# Altium PCB ESP32_Dongle.PcbDoc
Units mil, origin at the board's own origin, x right, y up, seen from the top; angles counter-clockwise.
Board outline 1330 x 1890 mil, 4 copper layers (L1, L2, L3, L4), stack 42.334 mil thick; 54 components, 44 nets, 205 pads, 118 vias.
Unrouted connection lines stored in the file: 123.
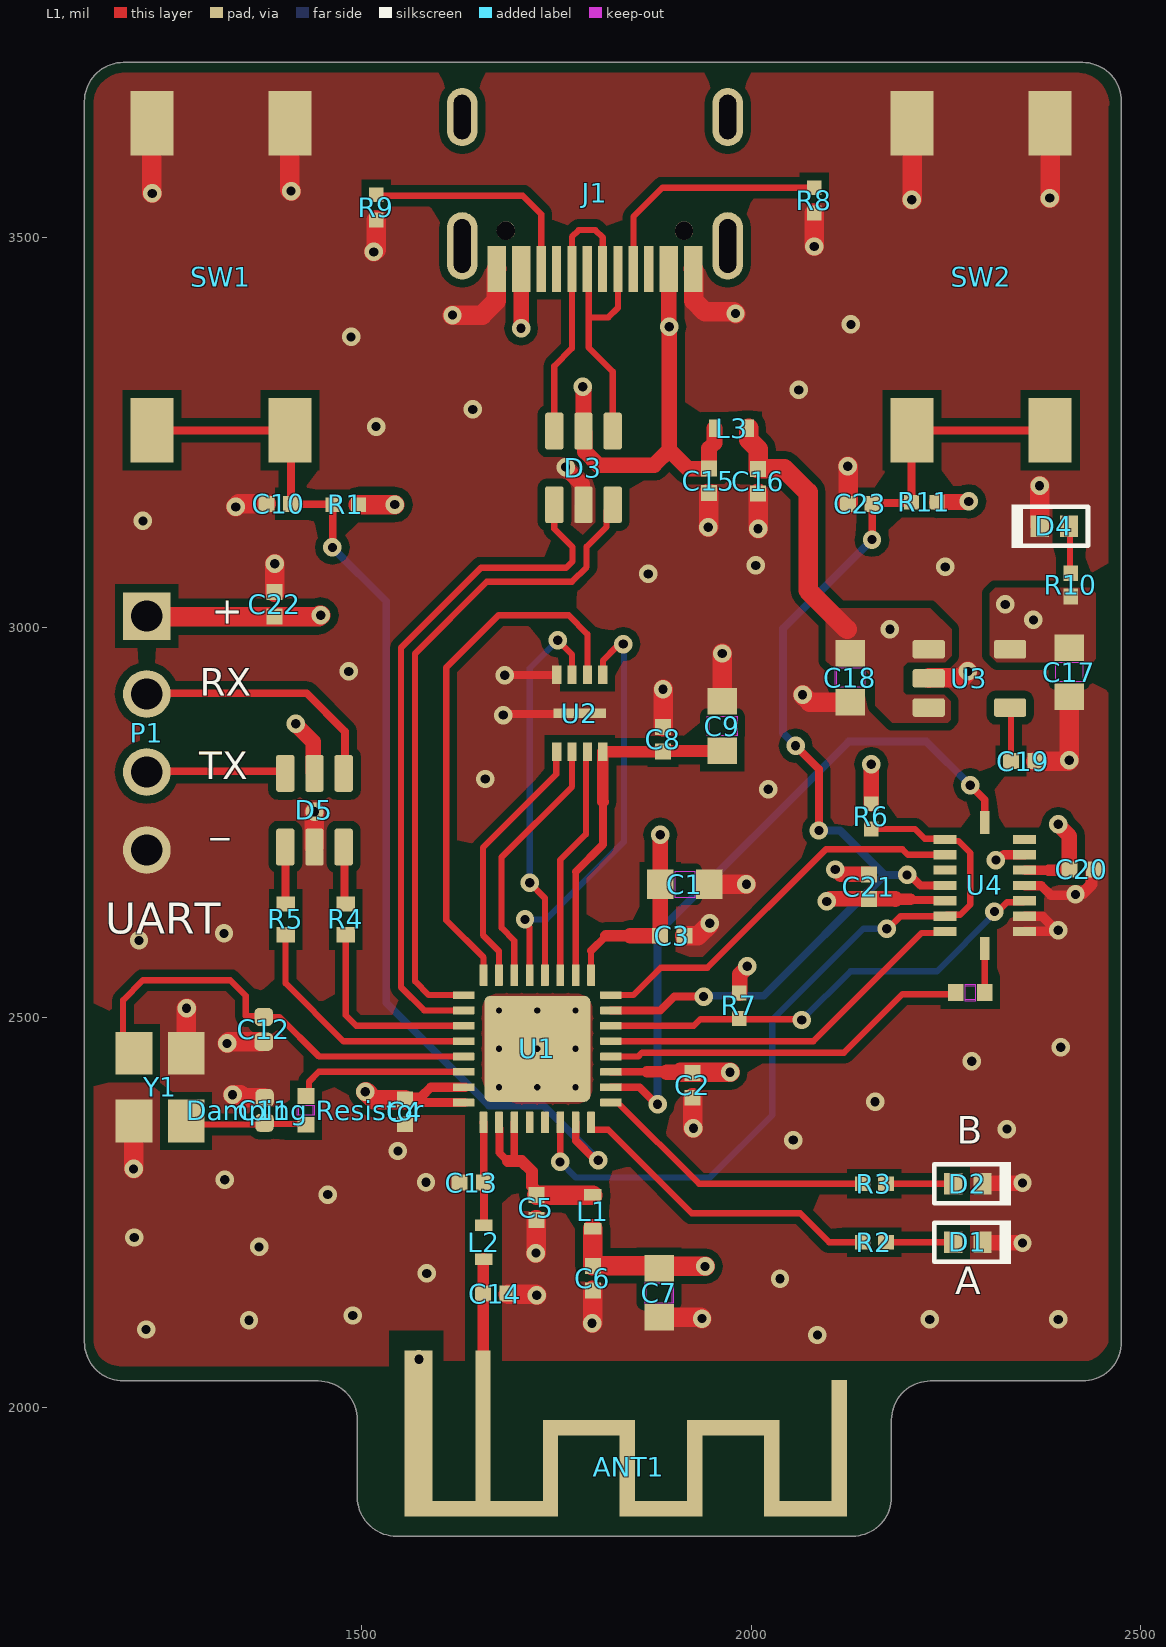
[diagram p0: L1 view]
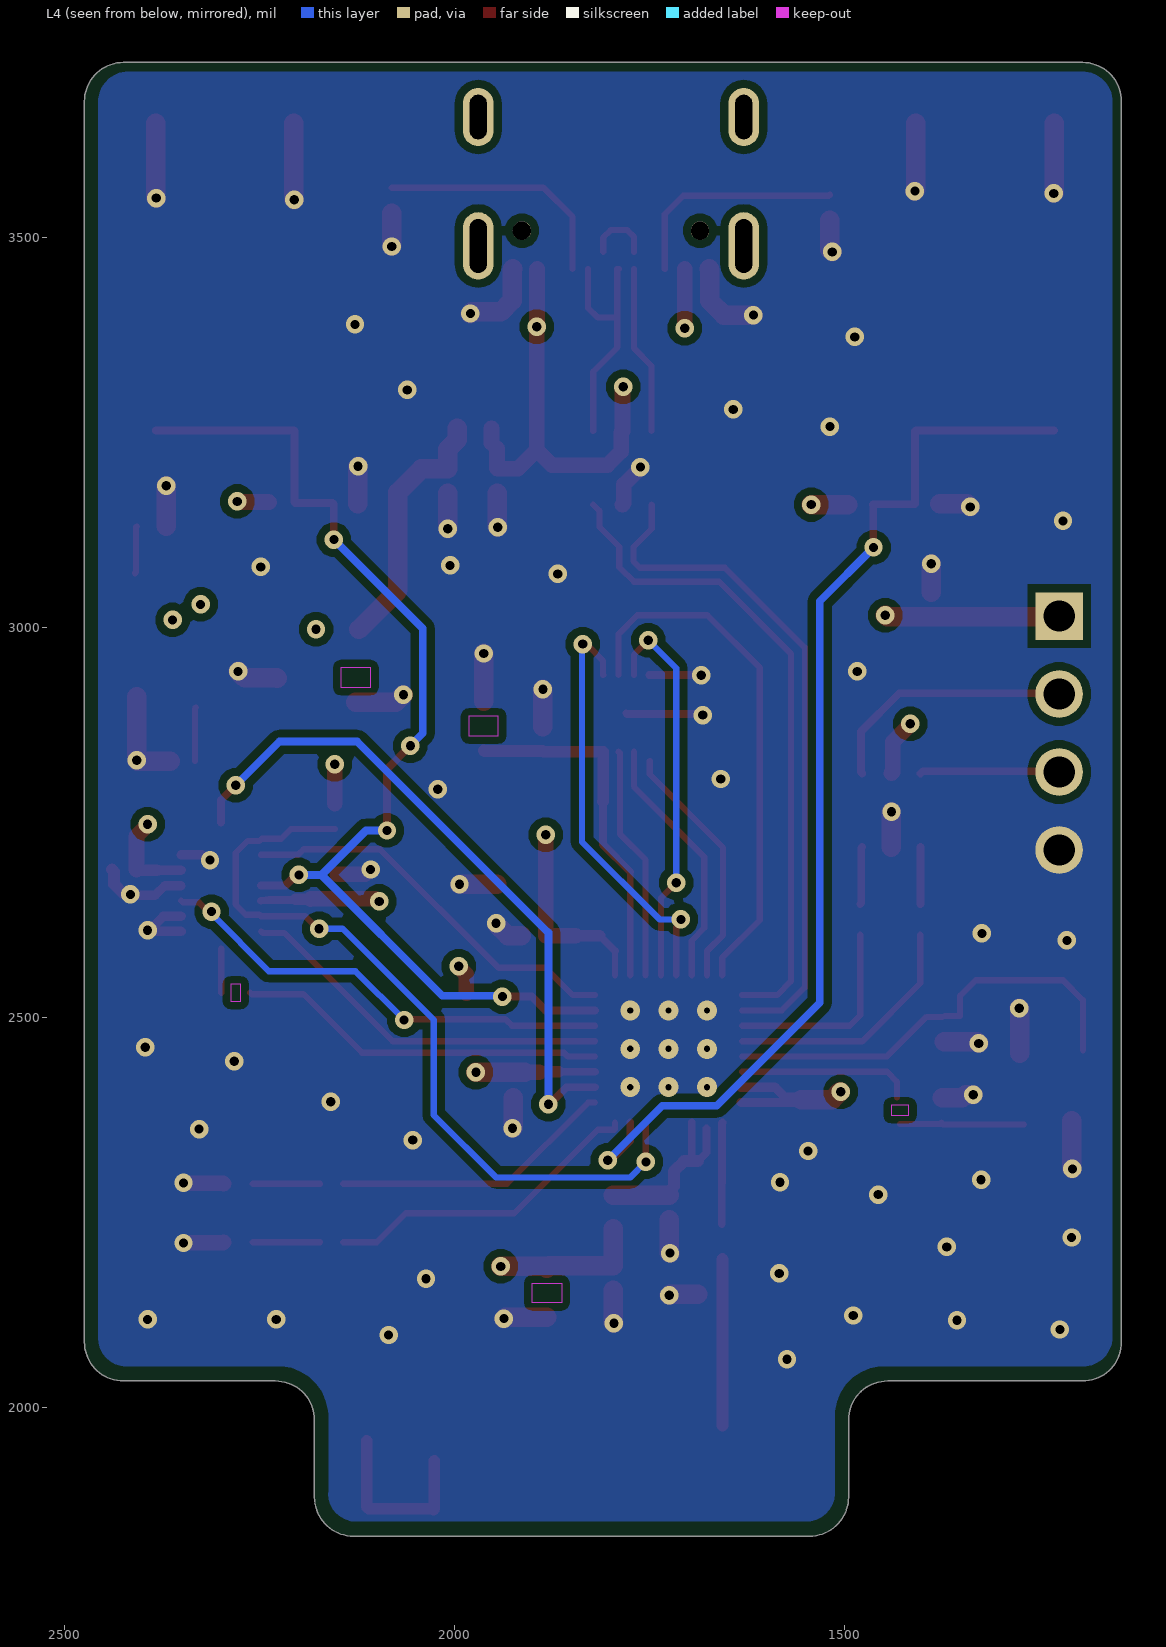
[diagram p1: L4 view, seen from below]
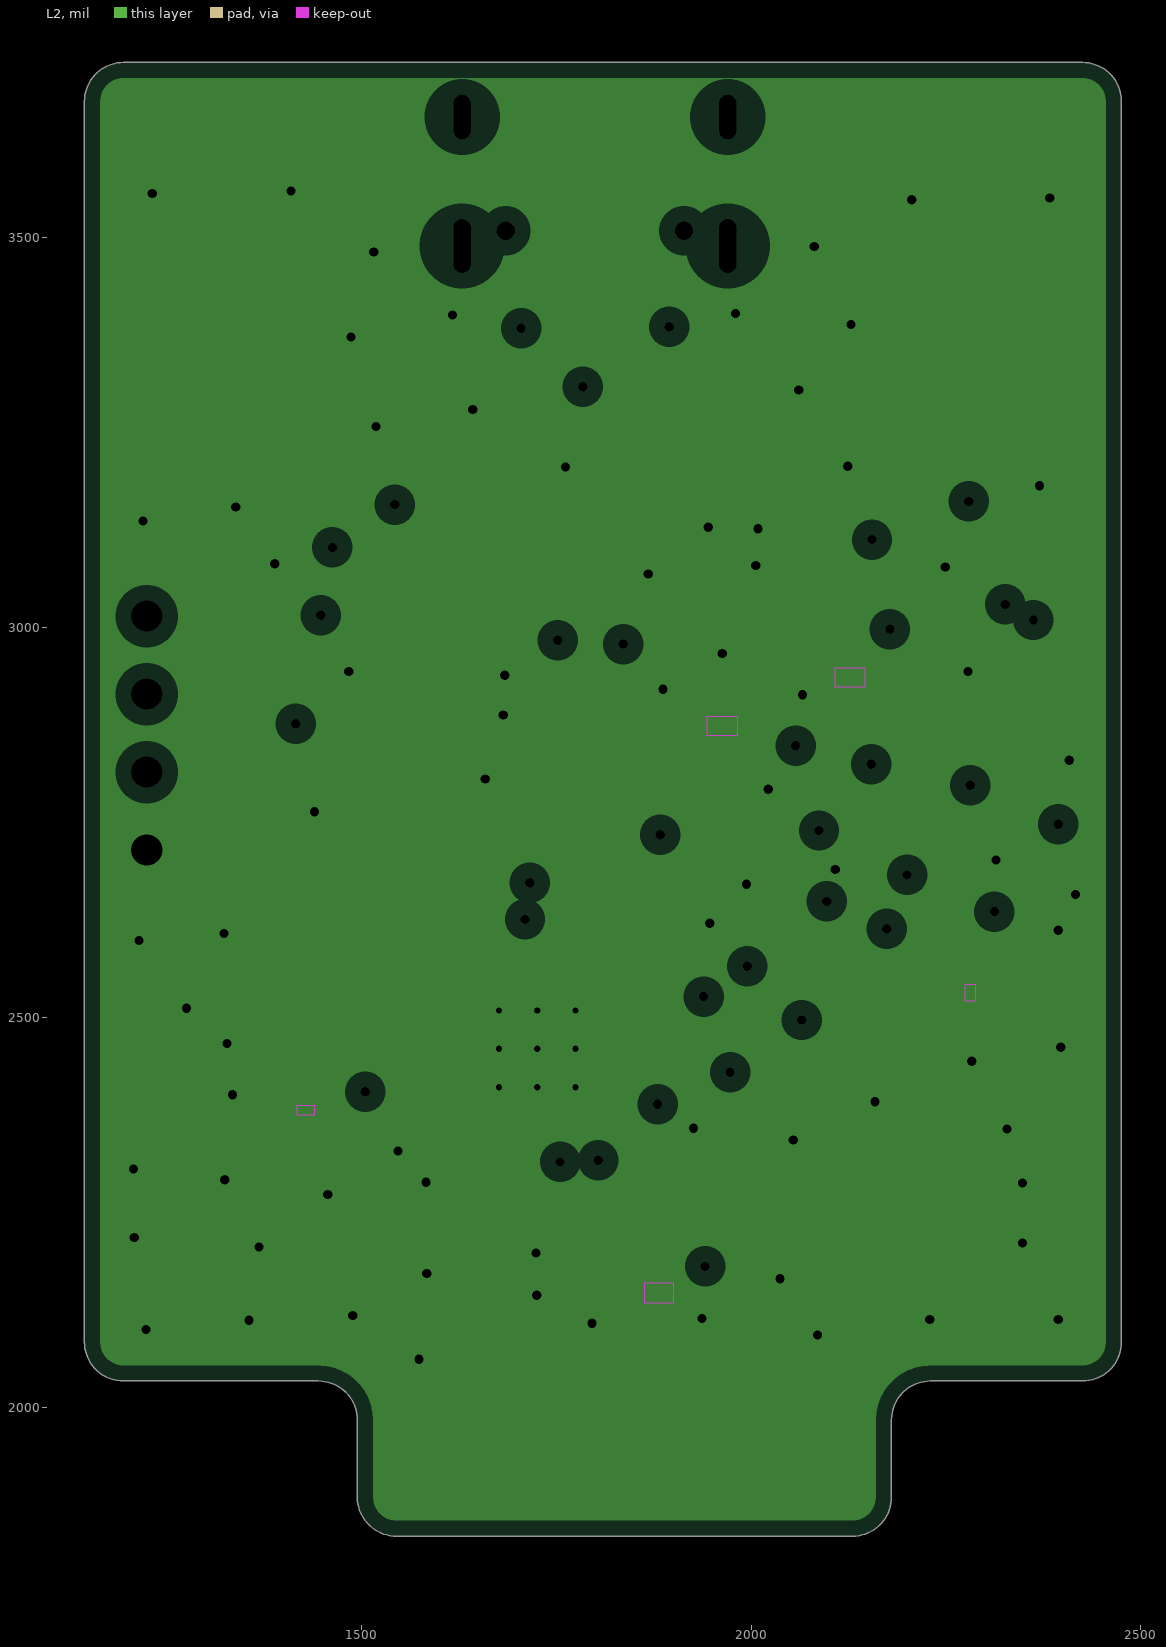
[diagram p2: L2, clearances drawn from the general rule]
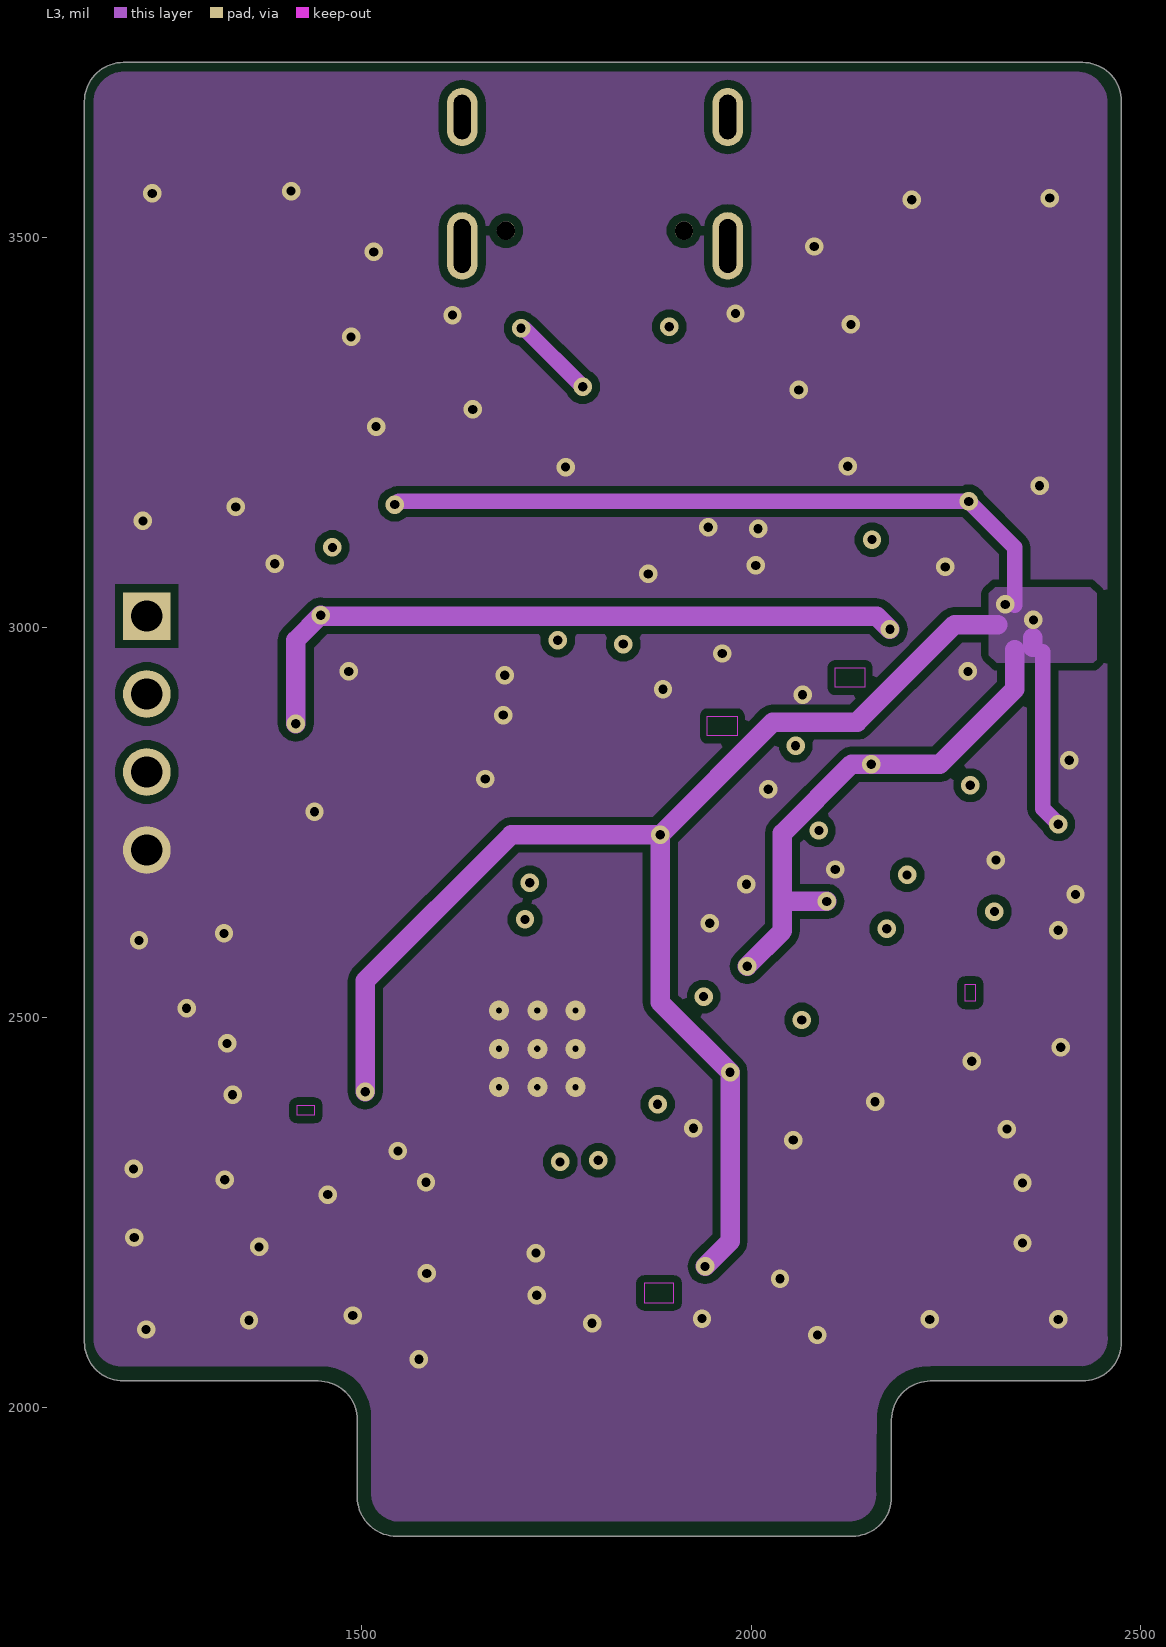
[diagram p3: L3]
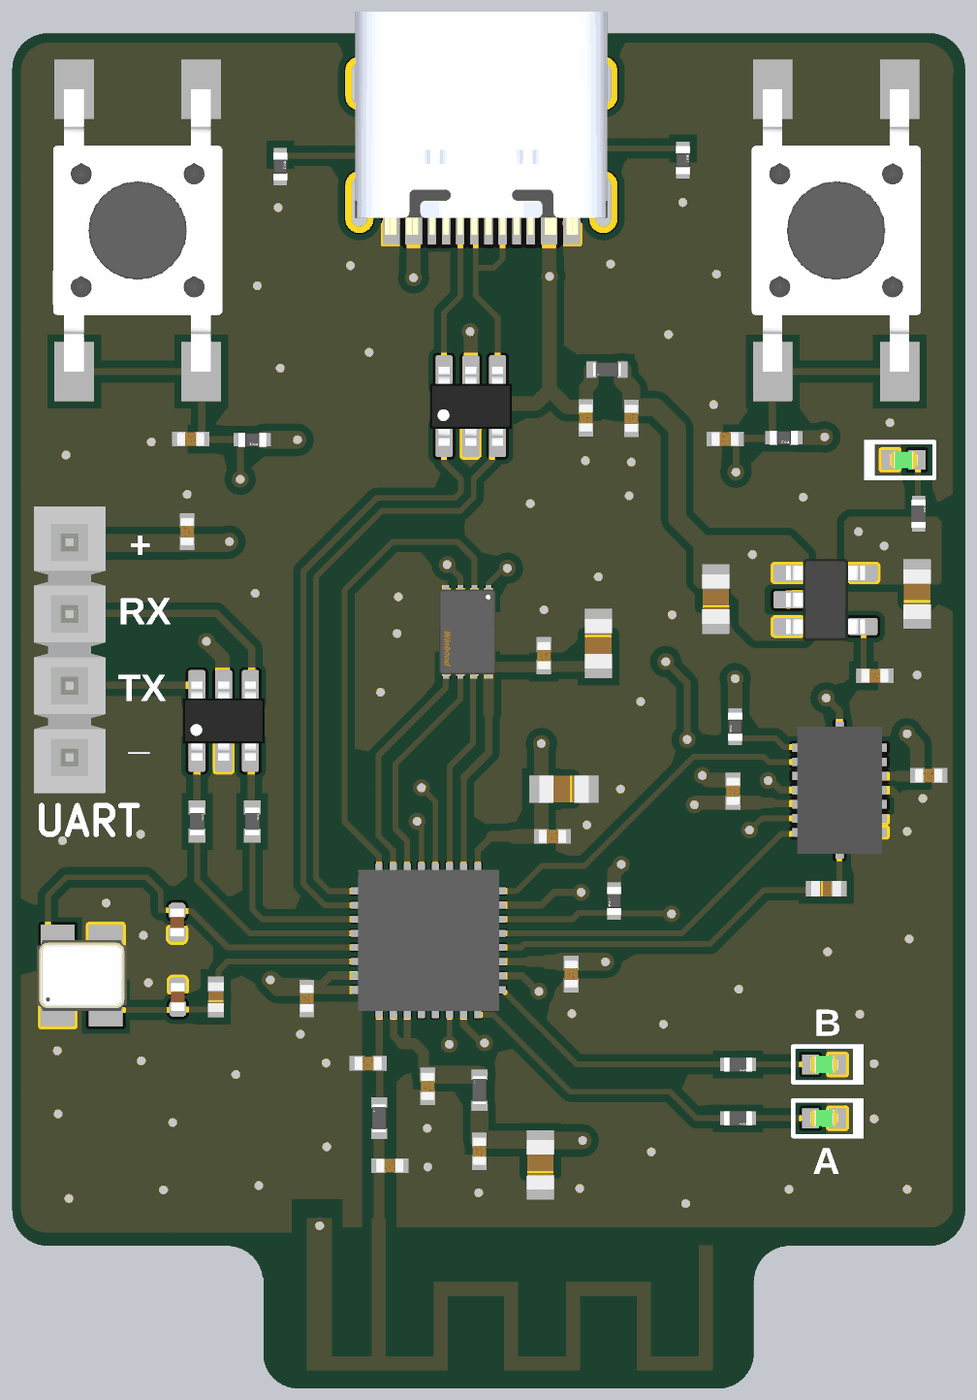
[diagram p4: 3D render of the assembled board from above, using the file's embedded part models]

## Layer stack, top to bottom
Top Solder: solder mask 0.4, Solder Resist, Dk 4
L1: signal copper 1.378
Dielectric 2: prepreg 5.1, PP-017, Dk 4.6
L2: plane copper 0.689, net GND
Dielectric 1: core 28, Core-039, Dk 4.6
L3: signal copper 0.689
Dielectric 3: prepreg 5.1, PP-017, Dk 4.6
L4: signal copper 1.378
Bottom Solder: solder mask 1, SM-001, Dk 4

## Board outline
1195,2034 cw(c1195,2084) 1145,2084 1145,3675 cw(c1195,3675) 1195,3725 2425,3725 cw(c2425,3675) 2475,3675 2475,2147 2475,2084 cw(c2425,2084) 2425,2034 2230,2034 ccw(c2230,1984) 2180,1984 2180,1885 cw(c2130,1885) 2130,1835 1545,1835 cw(c1545,1885) 1495,1885 1495,1984 ccw(c1445,1984) 1445,2034

## Design rules (kind name [scope] priority, off if disabled: settings)
Clearance Clearance_2 [InNamedPolygon('GND_L1') OR InNamedPolygon('GND_L3') OR InNamedPolygon('GND_L4')] p1: gap=10 ignorepadtopadclearanceinfootprint=TRUE
Clearance Clearance_1 [InComponent('U1') and InComponent('C9')] p2: gap=1 ignorepadtopadclearanceinfootprint=TRUE
Clearance [All] p3: gap=2 ignorepadtopadclearanceinfootprint=TRUE
DiffPairsRouting [All] p1: maxlimit=10 minlimit=10 mostfreqgap=10 toplayer_minwidth=8 toplayer_maxwidth=15 toplayer_prefwidth=10 midlayer1_minwidth=8 midlayer1_maxwidth=15 midlayer1_prefwidth=10 bottomlayer_minwidth=8 bottomlayer_maxwidth=15 bottomlayer_prefwidth=10 maxuncoupledlength=500
MinimumSolderMaskSliver [All] p1: minsoldermaskwidth=0
PlaneClearance [All] p1: clearance=20
PlaneConnect [All] p1: pad.planeconnectstyle=Relief pad.reliefexpansion=20 pad.reliefentries=4 pad.reliefconductorwidth=10 pad.reliefairgap=10 via.planeconnectstyle=Direct via.reliefexpansion=20 via.reliefentries=4 via.reliefconductorwidth=10 via.reliefairgap=10
PolygonConnect [All] p1: connectstyle=Direct reliefconductorwidth=10 reliefentries=4 polygonreliefangle="90 Angle" airgapwidth=10
RoutingVias [All] p1: holewidth=11.81 width=23.62 viastyle="Through Hole" minholewidth=11.81 minwidth=23.62 maxholewidth=28 maxwidth=50
ShortCircuit [All] p1: allowed=TRUE
SilkToSolderMaskClearance [IsPad] p1: minsilkscreentomaskgap=6 clearancetoexposedcopper=TRUE
SolderMaskExpansion [All] p1: expansion=4 istentingtop=FALSE
SupplyNets "Schematic Supply Nets_5" [InNet('3V3')] p1: voltage=0.000
SupplyNets "Schematic Supply Nets_4" [InNet('VCC_SPI')] p2: voltage=0.000
SupplyNets "Schematic Supply Nets_3" [InNet('VBUS_USB')] p3: voltage=0.000
SupplyNets "Schematic Supply Nets_2" [InNet('GND')] p4: voltage=0.000
SupplyNets "Schematic Supply Nets_1" [InNet('VBUS_FILT')] p5: voltage=0.000
SupplyNets "Schematic Supply Nets" [InNet('3V3_RF')] p6: voltage=0.000
Width [All] p1: maxlimit=25 minlimit=0.04 preferedwidth=8 minimp=50.000000 maximp=50.000000 favimp=50.000000
24 further rules are at their usual default settings.

## Classes and differential pairs
differential pair USB: +USB_P -USB_N
differential pair MCU_USB: +MCU_USB_P -MCU_USB_N

## Components (designator, comment, footprint, x,y, rotation, side; value= is the part's Value field where it differs from the comment)
ANT1 "PCB Antenna 2.4GHz 50Ohm" ANT_IFA_USB_2_4GHZ_50R 1573.5,2072.82 r0 top
C1 "10u 10V" CAP_0603J_AVX#1 1915,2671 r180 top
C2 "100nF 25V" FP-C0402-BB-MFG 1925,2413 r270 top value="0.10 μF"
C3 "100nF 25V" FP-C0402-BB-MFG 1899,2605 r0 top value="0.10 μF"
C4 "100nF 25V" FP-C0402-BB-MFG 1556,2379 r270 top value="0.10 μF"
C5 "100nF 25V" FP-C0402-BB-MFG 1724.68,2256.49 r270 top value="0.10 μF"
C6 "100nF 25V" FP-C0402-BB-MFG 1797,2166 r270 top value="0.10 μF"
C7 "10u 10V" CAP_0603J_AVX#2 1882,2147 r90 top
C8 "100nF 25V" FP-C0402-BB-MFG 1887,2857 r90 top value="0.10 μF"
C9 "10u 10V" CAP_0603J_AVX#2 1963,2874 r270 top
C10 "100nF 25V" FP-C0402-BB-MFG 1394,3159 r180 top value="0.10 μF"
C11 "10p" CAPC1005X55N 1376,2381 r270 top
C12 "10p" CAPC1005X55N 1375,2485 r90 top
C13 "3.3p" FP-C0402-BB-MFG 1641.68,2288.49 r0 top value="33,000 pF"
C14 "3.3p" FP-C0402-BB-MFG 1672,2146 r180 top value="33,000 pF"
C15 "100nF 25V" FP-C0402-BB-MFG 1945.68,3188.49 r270 top value="0.10 μF"
C16 "100nF 25V" FP-C0402-BB-MFG 2009,3188 r270 top value="0.10 μF"
C17 "10u 10V" CAP_0603J_AVX#1 2408,2943 r90 top
C18 "10u 10V" CAP_0603J_AVX#2 2127,2936 r90 top
C19 "100nF 25V" FP-C0402-BB-MFG 2349,2829 r0 top value="0.10 μF"
C20 "100nF 25V" FP-C0402-BB-MFG 2424,2690 r0 top value="0.10 μF"
C21 "100nF 25V" FP-C0402-BB-MFG 2151,2668 r270 top value="0.10 μF"
C22 "100nF 25V" FP-C0402-BB-MFG 1389,3030 r90 top value="0.10 μF"
C23 "100nF 25V" FP-C0402-BB-MFG 2140,3159 r180 top value="0.10 μF"
D1 "GREEN" LED0402G 2278,2212 r180 top
D2 "GREEN" LED0402G 2278,2287 r180 top
D3 "USBLC6-2SC6" SOT-23-6 1785,3205 r0 top
D4 "GREEN" LED0402G 2389,3130 r0 top
D5 "USBLC6-2SC6" SOT-23-6 1440,2766 r0 top
"Damping Resistor" "22R" 0402_PAN 1429,2381 r90 top
J1 "TYPE-C-31-M-12" TYPE-C-31-M-12 1799.72,3572.32 r180 top
L1 "2.2nF 0.35A" FP-MLZ1005-IPC_B 1797,2251 r90 top
L2 "2.2nF 0.35A" FP-MLZ1005-IPC_B 1657,2212 r90 top
L3 "2.2nF 0.35A" FP-MLZ1005-IPC_B 1975,3256 r180 top
P1 "TSW-104-08-L-S" SMTC-TSW-104-08-X-S 1225,3015 r270 top
R1 "5.1k" FP-RN73R1E-IPC_C 1480,3158 r0 top
R2 "1k 50V" FP-AC0402-IPC_C 2158,2212 r0 top
R3 "1k 50V" FP-AC0402-IPC_C 2158,2287 r0 top
R4 "470R" FP-AC0402-MFG 1480,2626 r90 top
R5 "470R" FP-AC0402-MFG 1403,2626 r90 top
R6 "5.1k" FP-RN73R1E-IPC_C 2154,2758 r270 top
R7 "5.1k" FP-RN73R1E-IPC_C 1985,2515 r270 top
R8 "5.1k" FP-RN73R1E-IPC_C 2081,3548 r90 top
R9 "5.1k" FP-RN73R1E-IPC_C 1519,3539 r90 top
R10 "1k 50V" FP-AC0402-IPC_C 2410,3055 r90 top
R11 "5.1k" FP-RN73R1E-IPC_C 2222,3161 r0 top
SW1 "1301.9315.24" FP-1301_9315_24-MFG 1320,3450 r270 top
SW2 "1301.9315.24" FP-1301_9315_24-MFG 2295,3450 r270 top
U1 "ESP32-C3" QFN32-5x5 1725.79,2460 r90 top
U2 "W25Q16JVUXIQ" FP-UX-MFG 1780.21,2890.28 r270 top
U3 "SPX3819M5-L-3-3/TR" SOT-23-5 2280,2935 r0 top
U4 "BMI055" BMI088 2299.68,2669.49 r270 top
Y1 "C3E-40.000-10-1015-X-R" XTAL_C3E-40.000-10-1015-X-R 1242,2411 r270 top
? "22R" 0402_PAN 2281,2532 r0 top

## Footprints (in the part's own frame and the unit in brackets; to place one, negate y for a bottom-side part, rotate by r counter-clockwise, add the part's x,y. Pads: shape width x height; smd on the part's side, far side on the other; paste and mask are expansions set on the pad)
0402_PAN [mil]
  rect 20x22 smd paste+0 mask+0: 1(-18.5,0) 2(18.5,0)
  L1 keep-out region: -6.5,-9 -6.5,9 6.5,9 6.5,-9
  Keep-Out Layer region: -6.5,-11 -6.5,11 6.5,11 6.5,-11
  body extent -21,-11 21,11, height 16
ANT_IFA_USB_2_4GHZ_50R [mm]
  rect 5x0.5 smd paste-2539.97 mask+0.102: 1(2.05,-5.15)
  rect 0.5x4.9 smd paste-2539.97 mask+0.102: 1(2.1,-2.45)
  rect 0.5x2.64 smd paste-2539.97 mask+0.102: 1(4.3,-3.58) 1(6.8,-3.58) 1(9,-3.58) 1(11.5,-3.58)
  rect 2x0.5 smd paste-2539.97 mask+0.102: 1(5.55,-2.51) 1(10.25,-2.51)
  rect 2.7x0.5 smd paste-2539.97 mask+0.102: 1(7.9,-5.15) 1(12.6,-5.15)
  rect 0.5x3.94 smd paste-2539.97 mask+0.102: 1(13.7,-2.93)
  rect 0.9x4.9 smd paste-2539.97 mask+0.102: 2(0,-2.45)
BMI088 [mm]
  rect 0.3x0.75 smd: 1(-1.5,1.3) 2(-1,1.3) 3(-0.5,1.3) 4(0,1.3) 5(0.5,1.3) 6(1,1.3) 7(1.5,1.3) 9(1.5,-1.3) 10(1,-1.3) 11(0.5,-1.3) 12(0,-1.3) 13(-0.5,-1.3) 14(-1,-1.3) 15(-1.5,-1.3)
  rect 0.75x0.3 smd: 8(2.05,0) 16(-2.05,0)
  body extent -2.25,-1.5 2.25,1.5, height 1.01
CAP_0603J_AVX#1 [mil]
  rect 34x38 smd paste+0 mask+0: 1(-31.5,0) 2(31.5,0)
  L1 keep-out region: -12.5,-17 -12.5,17 12.5,17 12.5,-17
  body extent -34,-19 34,19, height 37
CAP_0603J_AVX#2 [mil]
  rect 34x38 smd paste+0 mask+0: 1(-31.5,0) 2(31.5,0)
  L1 keep-out region: -12.5,17 -12.5,-17 12.5,-17 12.5,17
  Keep-Out Layer region: -12.5,19 -12.5,-19 12.5,-19 12.5,19
  body extent -34,-19 34,19, height 37
CAPC1005X55N [mm]
  rrect53% 0.59x0.6 smd: 1(-0.405,0) 2(0.405,0)
  body extent -0.5,-0.25 0.5,0.25, height 0.55
FP-1301_9315_24-MFG [mm]
  rect 2.1x1.4 smd paste+0 mask+0: 1(-5,2.25) 2(5,2.25) 3(-5,-2.25) 4(5,-2.25)
  body extent -6.15,-3.1 6.15,3.1, height 0.25
FP-AC0402-IPC_C [mil]
  rect 20.29x18.6 smd paste+0 mask+0: 1(-14.9,0) 2(14.9,0)
  body extent -29,-15 29,15, height 10
FP-AC0402-MFG [mm]
  rect 0.5x0.6 smd paste+0 mask+0: 1(-0.5,0) 2(0.5,0)
  body extent -0.85,-0.4 0.85,0.4, height 0.25
FP-C0402-BB-MFG [mm]
  rect 0.52x0.52 smd paste+0 mask+0: 1(-0.4,0) 2(0.4,0)
  body extent -0.8,-0.4 0.8,0.4, height 0.25
FP-MLZ1005-IPC_B [mm]
  rect 0.372x0.572 smd paste+0 mask+0: 1(-0.55,0) 2(0.55,0)
  body extent -0.5,-0.25 0.5,0.25, height 0.55
FP-RN73R1E-IPC_C [mil]
  rect 19.2x18.6 smd paste+0 mask+0: 1(-16.3,0) 2(16.3,0)
  body extent -30,-15 30,15, height 10
FP-UX-MFG [mm]
  rect 0.6x0.3 smd paste-1000 mask-1000: 1(-1.25,0.75) 2(-1.25,0.25) 3(-1.25,-0.25) 4(-1.25,-0.75) 5(1.25,-0.75) 6(1.25,-0.25) 7(1.25,0.25) 8(1.25,0.75)
  rect 0.3x1.7 smd paste-1000 mask+0: 9(0,0)
  body extent -1.75,-1.15 1.75,1.15, height 0.25
LED0402G [mm]
  rect 0.6x0.7 smd: 1(-0.475,0) 2(0.475,0)
  silkscreen extent -1.4,-0.71 1.09,0.71, body extent -0.5,-0.3 0.5,0.3, height 0.21
QFN32-5x5 [mm]
  rrect10% 0.7x0.25 smd mask+0.05: 1(-2.4,1.75) 2(-2.4,1.25) 3(-2.4,0.75) 4(-2.4,0.25) 5(-2.4,-0.25) 6(-2.4,-0.75) 7(-2.4,-1.25) 8(-2.4,-1.75) 17(2.4,-1.75) 18(2.4,-1.25) 19(2.4,-0.75) 20(2.4,-0.25) 21(2.4,0.25) 22(2.4,0.75) 23(2.4,1.25) 24(2.4,1.75)
  rrect10% 0.25x0.7 smd mask+0.05: 9(-1.75,-2.4) 10(-1.25,-2.4) 11(-0.75,-2.4) 12(-0.25,-2.4) 13(0.25,-2.4) 14(0.75,-2.4) 15(1.25,-2.4) 16(1.75,-2.4) 25(1.75,2.4) 26(1.25,2.4) 27(0.75,2.4) 28(0.25,2.4) 29(-0.25,2.4) 30(-0.75,2.4) 31(-1.25,2.4) 32(-1.75,2.4)
  rrect10% 3.45x3.45 smd mask+0.07: 33(0,0)
  body extent -2.5,-2.5 2.5,2.5, height 0.85
SMTC-TSW-104-08-X-S [mm] ".025 SQ Post Terminal Strip Assembly, 1x4 Pins, Vertical, 2.54mm Pitch, Male"
  rect 1.55x1.55 hole 1.02: 1(0,0)
  round 1.55 hole 1.02: 2(2.54,0) 3(5.08,0) 4(7.62,0)
  body extent -1.27,-1.27 8.89,1.27, height 8.38
SOT-23-5 [mm] "SOT23, 5-Leads, Body 2,90x2,80mm, Pitch 0,95mm, IPC Medium Density"
  rrect25% 1.05x0.6 smd: 1(-1.325,0.95) 2(-1.325,0) 3(-1.325,-0.95) 4(1.325,-0.95) 5(1.325,0.95)
  body extent -1.4,-1.45 1.4,1.45, height 1.45
SOT-23-6 [mm]
  rrect25% 0.6x1.2 smd: 1(-0.95,-1.2) 2(0,-1.2) 3(0.95,-1.2) 4(0.95,1.2) 5(0,1.2) 6(-0.95,1.2)
  body extent -1.45,-1.4 1.45,1.4, height 1.45
TYPE-C-31-M-12 [mm]
  rect 0.6x1.5 smd mask+0.07: A1B12(-3.2,2.85) B1A12(3.2,2.85)
  rect 0.6x1.5 smd mask+0.14: A4B9(-2.4,2.85) B4A9(2.4,2.85)
  rect 0.3x1.5 smd mask+0.14: A5(-1.25,2.85) A6(-0.25,2.85) A7(0.25,2.85) A8(1.25,2.85) B5(1.75,2.85) B6(0.75,2.85) B7(-0.75,2.85) B8(-1.75,2.85)
  round 0.6 hole 0.6 unplated mask+0.3: MH(-2.9,1.6) MH(2.9,1.6)
  oval 1x1.9 hole 0.55 slot 1.45 at 90 deg mask+0.05: SH(-4.325,-2.1) SH(4.325,-2.1)
  oval 1x2.2 hole 0.55 slot 1.75 at 90 deg mask+0.05: SH(-4.325,2.1) SH(4.325,2.1)
  body extent -4.47,-4.65 4.47,3.25, height 3.32
XTAL_C3E-40.000-10-1015-X-R [mm]
  rect 1.4x1.2 smd: 1(-1.1,-0.85) 2(1.1,-0.85) 3(1.1,0.85) 4(-1.1,0.85)
  body extent -1.6,-1.25 1.6,1.25, height 0.75

## Part data
ANT1: library part ANT_IFA_USB_2_4GHZ_50R, "Inverted F 2.4GHz ISM PCB Antenna 50 Ohm", ComponentLink1Description=Datasheet, ComponentLink1URL=https://www.ti.com/lit/an/swra117d/swra117d.pdf
C1 C7 C9 C17 C18: library part 0603ZD106KAT4A, "No Description Available", Manufacturer_Name="KYOCERA AVX", Copyright="Copyright (C) 2026 Ultra Librarian. All rights reserved.", Manufacturer_Part_Number=0603ZD106KAT4A
C2 C3 C4 C5 C6 C8 C10 C15 C16 C19 C20 C21 C22 C23: library part CMP-03020-014070-2, "CAP CER 0.1UF 25V X5R 0402", Capacitance="0.10 μF", Manufacturer=Kemet, Manufacturer Part Number=C0402C104M3PAC7867, Package=C0402-BB, Temperature="-55°C to +125°C", Temperature Characteristic=X5R, Temperature Coefficient=15%, Temperature Range High=+125°C, Temperature Range Low=-55°C, Tolerance=0.2, Voltage Rating="25 V", Automotive=No, Category=Cap, ComponentLink2Description=Datasheet, ComponentLink2URL=https://content.kemet.com/datasheets/KEM_C1002_X7R_SMD.pdf, Device Class L1="Passive Components", Device Class L2=Capacitors, Device Class L3="Ceramic Capacitors", Digikey Description="CAP CER 0.1UF 25V X5R 0402", Height=0.55mm, Lead Free=Yes, Material=Ceramic, Octopart=https://octopart.com/c0402c104m3pac7867-kemet-84304880, RoHS=TRUE, Ipc Land Pattern Name=CAPC10050X50
C11 C12: library part C0402C100K5GACTU, "10 pF Â±10% 50V Ceramic Capacitor C0G, NP0 0402 (1005 Metric)", Package="0402 KEMET", Check_prices=https://www.snapeda.com/parts/C0402C100K5GACTU/KEMET/view-part/?ref=eda, MF=KEMET, MP=C0402C100K5GACTU, SnapEDA_Link=https://www.snapeda.com/parts/C0402C100K5GACTU/KEMET/view-part/?ref=snap
C13 C14: library part CMP-03020-024301-1, "CAP CER 0.033UF 25V X7R 0402", Capacitance="33,000 pF", Manufacturer=Kemet, Manufacturer Part Number=C0402C333K3RACAUTO, Package=C0402-BB, Temperature="-55°C to +125°C", Temperature Characteristic=X7R, Temperature Coefficient=15%, Temperature Range High=+125°C, Temperature Range Low=-55°C, Tolerance=0.1, Voltage Rating="25 V", Automotive=No, Category=Cap, ComponentLink2Description=Datasheet, ComponentLink2URL=https://content.kemet.com/datasheets/KEM_C1002_X7R_SMD.pdf, Device Class L1="Passive Components", Device Class L2=Capacitors, Device Class L3="Ceramic Capacitors", Digikey Description="CAP CER 0.033UF 25V X7R 0402", Height=0.55mm, Lead Free=Yes, Material=Ceramic, Octopart=https://octopart.com/c0402c333k3racauto-kemet-47202579, RoHS=TRUE, Ipc Land Pattern Name=CAPC10050X50
D1 D2 D4: library part VLMG1500-GS08, "LED YLW-GRN 0402 SMD", Case Code (Metric)=1005, Case Code (Imperial)=0402, Color=Green,Yellow, Forward Current=30mA, Forward Voltage=2V, LCSC Part Number=C511404, Lens Color=Clear, Manufacturer=Vishay, Max Operating Temperature=85°C, Min Operating Temperature=-30°C, Package Quantity=1, Power Dissipation=75mW, Reverse Voltage=5V, Supplier Part Number=VLMG1500-GS08CT-ND, Test Current=20mA, Illumination Color=Green, Case/Package=0402, Category=LEDs, ComponentLink1Description=https://datasheet.ciiva.com/12071/vlmo1500-244705-12071911.pdf?src-supplier=Mouser, ComponentLink1URL=https://datasheet.ciiva.com/12071/vlmo1500-244705-12071911.pdf?src-supplier=Mouser, ComponentLink2Description=https://datasheet.ciiva.com/30005/vlmo1500-30005134.pdf?src-supplier=Avnet, ComponentLink2URL=https://datasheet.ciiva.com/30005/vlmo1500-30005134.pdf?src-supplier=Avnet, Depth=0.5mm, Dominant Wavelength=571nm, Height=0.35mm, Lead Free="Lead Free", Length=1mm, Lens Style=Rectangular, Luminous Intensity=35mcd, Manufacturer Part Number=VLMG1500-GS08, Mounting Technology="Surface Mount", Number of Elements=1, Number of LEDs=1, Packaging="Tape and Reel", Pins=2, Power Rating=75mW, Pricing="1=0.34, 10=0.265, 100=0.119, 500=0.10746, 1000=0.08827 (USD)", Radiation Hardening=No, Reach SVHC Compliant=Unknown, RoHS=Yes, RoHS Compliant=Yes, Series=CHipLED, Stock=98, Supplier=Digikey, Viewing Angle=130°, Wavelength=571nm, Width=0.5mm
D3 D5: "Low-Capacitance ESD Protection USB", Manufacturer=STMicroelectronics, Distributor Link=https://www.mouser.de/ProductDetail/STMicroelectronics/USBLC6-2SC6?qs=po45yt2pPpu%2FhNIlwQdTlg%3D%3D, Manufacturer Part Number=USBLC6-2SC6
"Damping Resistor" ?: library part ERJ2RKD22R0X, "No Description Available", Manufacturer_Name=Panasonic, Copyright="Copyright (C) 2026 Ultra Librarian. All rights reserved.", Manufacturer_Part_Number=ERJ2RKD22R0X
J1: "USB Type C Connector Horizontal SMT", Manufacturer="Koren Hroparts", Manufacturer Part Number=TYPE-C-31-M-12
L1 L2 L3: library part CMP-08253-000201-1, "Shielded Multilayer Inductor 2.2uH ±20% 350mA 715mΩ SMD 0402", Case Code (Metric)=1005, Case Code (Imperial)=0402, Current Rating=350mA, DC Resistance (DCR)=715mR, Max Operating Temperature=125°C, Min Operating Temperature=-55°C, Package Quantity=10000, Saturation Current=60mA, Self Resonant Frequency=120MHz, Test Frequency=2MHz, Tolerance=20%, Inductance=2.2uH, Case/Package=0402, Core Material=Ferrite, Height - Seated (Max)=0.022inch, Length=0.039inch, Mount="Surface Mount", Packaging="Tape and Reel", RoHS Compliant=Yes, Shielding=Shielded, Width=0.02inch
P1: library part CMP-1024-00358-1, "0.025\" SQ Post Header, Through-hole, Vertical, -55 to 125 degC, 2.54 mm Pitch, 4-Pin, Male, RoHS", Manufacturer=Samtec, Temperature Range="-55 to 125 degC", ComponentLink1Description="Manufacturer URL", ComponentLink1URL=http://www.samtec.com, ComponentLink2Description=Datasheet, ComponentLink2URL=http://www.samtec.com/documents/webfiles/pdf/TSW_TH.PDF, ComponentLink3Description="Package Specification", ComponentLink3URL=http://www.samtec.com/documents/webfiles/cpdf/TSW-XXX-XX-XXX-X-XX-XXX-MKT.pdf, DatasheetVersion=F-214, Mounting Technology=Through-hole, Orientation=Vertical, PackageDescription=".025[0.64] SQ. Post Terminal Strip Assembly", PackageReference=TSW-104-08-X-S, PackageVersion="DM, 8/1988", PartNumber=TSW-104-08-L-S, Pitch="2.54 mm", RoHS=True
R1 R6 R7 R8 R9 R11: library part CMP-04015-008529-1, "5.1kΩ ±1% 0.063W, 1/16W Chip Resistor 0402 (1005 Metric) Moisture Resistant Thin Film"
R2 R3 R10: library part CMP-03412-047873-1, "RES 1kΩ ±1% 0.063W 0402", RoHS Compliant=Yes
R4 R5: library part CMP-03412-049712-1, "RES 470Ω ±5% 0.063W 0402"
SW1 SW2: library part CMP-26321-000002-1, "SWITCH TACTILE SPST-NO 0.05A 12V", Case/Package=SMD/SMT, Current Rating=50mA, Max Operating Temperature=70°C, Max Voltage Rating (DC)=12V, Min Operating Temperature=-20°C, Operating Force=1.6N, Package Quantity=1000, Ratings=IP40, Actuator Type=Standard, Contact Plating=Silver, Depth=10mm, Length=6mm, Max Current Rating=50mA, Mechanical Life=100000Cycles, Mount="Surface Mount", Orientation=Straight, Packaging="Tape and Reel", Radiation Hardening=No, REACH SVHC="No SVHC", RoHS Compliant=Yes, Series=LSH, Switch Function=Off-Mom, Switch Travel=0.25mm, Termination="Gull Wing", Throw Configuration=SPST, Voltage Rating (AC)=12V, Voltage Rating (DC)=12V, Illumination Type=Illuminated
U1: "Ultra­Low­Power SoC with RISC­V Single­Core CPU Supporting IEEE 802.11b/g/n (2.4 GHz Wi­Fi) and Bluetooth® 5 (LE)", LCSC=C2838500, Manufacturer=Espressif, Manufacturer Part Number=ESP32-C3
U2: library part CMP-78876-000011-1, "IC FLASH 16MBIT SPI/QUAD 8USON", RoHS Compliant=Yes
U3: "500mA +3.3V Low-Noise LDO Voltage Regulator", Manufacturer=MaxLinear, Manufacturer Part Number=SPX3819M5-L-3-3/TR
U4: "Inertial Measurement Unit IMU 6-Axis LGA", LCSC=C189620, Manufacturer=Bosch, Manufacturer Part Number=BMI055
Y1: "40 MHz Â±10ppm Crystal 10pF 50 Ohms 4-SMD, No Lead", Package="SMD-4 Aker", Check_prices=https://www.snapeda.com/parts/C3E-40.000-10-1015-X-R/Aker/view-part/?ref=eda, MF="Aker Technology USA", MP=C3E-40.000-10-1015-X-R, SnapEDA_Link=https://www.snapeda.com/parts/C3E-40.000-10-1015-X-R/Aker/view-part/?ref=snap

## Via types
v1: diameter 23.62, hole 11.81, L1 to L4, tented both sides, 109 vias
v2: diameter 25.59, hole 7.87, L1 to L4, tented both sides, 9 vias

## Nets (pads, with @x,y where several pads share a name; then routed paths per layer and width w, separated by ;. In a path a pad name is that pad's centre, name@x,y a point inside that pad or via, vN(x,y) a via of type N, cw(c..) or ccw(c..) an arc to the next point about the centre after c; other vN are vias at no path point)
3V3: C1.2 C2.1 C3.1 C4.1 C6.1 C7.2 C17.2 C20.1 C21.2 L1.1 R1.2 R6.1 R7.1 R10.1 R11.2 U1.11 U1.17 U1.31 U1.32 U3.5 U4.3 U4.11 | length 4823.7
  L1 w8: U1.17 1794.68,2585.68
  L1 w10: C4.1@1555.87,2394.87 C4.1 ; C4.1@1559.65,2391.1 C4.1 ; 1577.41,2398.98 1560.24,2398.98 C4.1 ; 1794.68,2585.68 1814,2605 ; U1.11 1866.53,2430.47 ; 2205.28,2651 2233.71,2651 2234,2650.71 2238.74,2650.71 U4.11
  L1 w12: C4.1@1559.65,2391.1 U1.32@1633,2391.1 ; 1577.41,2398.98 1589.21,2410.79 U1.31@1633,2410.79 ; U4.3 2381.83,2689.17
  L1 w15: 1814,2605 1845,2605 ; 1866.53,2430.47 1891.53,2430.47 1892,2430 ; 2185,2652 2204.28,2652 ; 2381.83,2689.17 2407.43,2689.17 C20.1
  L1 w20: v1(1505,2405) v1@1505.98,2405 ; C4.1@1555.76,2394.98 C4.1@1555.87,2394.87 ; 1845,2605 C3.1 1883.38,2605.12 1883.38,2670.88 C1.2 v1(1883.5,2734.5) ; 1892,2430 1910,2430 ; R7.1 1985.31,2531.61 1985.31,2555.33 1995,2565.02 v1(1995,2566) ; v1(2097,2649) 2097.98,2649 2101.23,2652.25 C21.2 2184.75,2652.25 2185,2652 ; R6.1 v1(2154,2825) ; R11.2 2238.61,3161.31 2278.31,3161.31 v1(2279,3162) ; v1(2394,2748) 2394,2747.02 2408.25,2732.77 C20.1
  L1 w25: R1.2 v1(1543,3158) ; v1@1505.98,2405 1516,2394.98 C4.1@1555.76,2394.98 ; L1.1 C6.1 1878.75,2181.75 C7.2 ; C7.2@1883.5,2180 1884.5,2181 v1(1941,2181) ; 1910,2430 v1(1973,2430)
  L3 w20: v1(1543,3158) 1543.98,3158 1547.98,3162 v1(2279,3162) 2338,3103 2338,3029.13 ; 2374,2969.1 2374,2768 v1(2394,2748)
  L3 w25: v1(1505,2405) 1505,2547 1692.5,2734.5 v1(1883.5,2734.5) 1883.5,2519.5 v1(1973,2430) 1973,2213 v1(1941,2181) ; v1@1884.19,2735.19 2028,2879 2136,2879 2261,3004 2316,3004 ; v1(1995,2566) 2040.16,2611.16 2040.16,2649 ; v1(2097,2649) 2040.16,2649 ; 2338,2972 2338,2921 2242,2825 v1(2154,2825) 2129,2825 2040.16,2736.16 2040.16,2649 ; 2361,2975 2361,2987.44
  other v1: 2362,3010 2326,3030
3V3_RF: C5.1 L1.2 U1.2 U1.3 | length 237.7
  L1 w10: U1.2@1677.16,2357.85 1677.16,2326.84 1688,2316 ; 1696,2316 1696.26,2316.26 U1.3 ; L1.2@1796.79,2272.44 L1.2
  L1 w15: 1688,2316 1696,2316 1706,2316 1719,2303 1719,2283.76 1721.95,2280.81 1721.95,2274.97 C5.1
  L1 w25: C5.1@1724.89,2272.44 L1.2@1796.79,2272.44
FSPI_CLK: ?.2 U4.8 | length 56.9
  L1 w8: ?.2 2299.59,2532.09 2299.59,2588.69 U4.8
FSPI_D: U1.13 U4.9 | length 486.5
  L1 w8: U1.13 2079.84,2469.84 2218.65,2608.65 2246.72,2608.65 U4.9
FSPI_NCS: U1.16 U4.14 | length 508.7
  L1 w8: U1.16 1848.9,2528.9 1884,2564 1944,2564 2096,2716 2194,2716 2201.14,2708.86 U4.14
FSPI_NCS2: R7.2 U1.14 U4.5 | length 599.6
  L1 w8: U1.14 1926.53,2489.53 1935,2498 1985,2498 1985.15,2497.85 2064.15,2497.85 v1(2065,2497) ; v1(2312,2636) 2316.23,2636 2328.12,2647.9 2348.96,2647.9 U4.5
  L4 w8: v1(2065,2497) 2127.5,2559.5 2238.5,2559.5 2312,2633 v1(2312,2636)
FSPI_Q: R6.2 U1.6 U4.10 U4.15 | length 1007.3
  L1 w8: v1(1755,2315) 1755.16,2315.16 1755.16,2365.35 U1.6 ; R6.2@2154,2742 2210,2742 2222.66,2729.34 2247.71,2729.34 2250.41,2726.64 2265.54,2726.64 2281,2711.17 2281,2645 2268.02,2632.02 2250.41,2632.02 U4.10 2191.56,2630.12 2175.44,2614 v1(2174,2614)
  L4 w8: v1(1755,2315) 1775,2295 1947,2295 2027,2375 2027,2497 2144,2614 v1(2174,2614)
GND: ANT1.2 C1.1 C2.2 C3.2 C4.2 C5.2 C6.2 C7.1 C8.2 C9.1 C10.2 C11.1 C12.1 C13.1 C14.1 C15.2 C16.2 C17.1 C18.1 C19.2 C20.2 C21.1 C22.2 C23.2 D1.1 D2.1 D3.2 D4.1 D5.2 J1.A1B12 J1.B1A12 P1.4 R8.1 R9.1 SW1.1 SW1.3 SW2.1 SW2.3 U1.33 U2.4 U2.9 U3.2 U4.2 U4.4 U4.6 U4.7 Y1.2 Y1.4 | length 2461
  L1 w10: v1(1682,2888) 1683.37,2889.37 1779.31,2889.37 U2.9 ; v1(1684,2939) 1684.24,2939.24 1750.44,2939.24 U2.4 ; v1@2415.11,2657.11 v1(2416,2658)
  L1 w12: v1(2314,2702) 2317.14,2702 2324,2708.86 U4.2 ; U4.7 2351.15,2610.71 2392.71,2610.71 v1(2394,2612) 2391.67,2612 2373.83,2629.84 2351.15,2629.84 U4.6 ; U4.4@2351.15,2669.21 2372.09,2669.21 2384.19,2657.11 v1@2415.11,2657.11
  L1 w15: v1(2416,2658) 2417.65,2659.65 2425.56,2659.65 2437.01,2671.1 2437.01,2687.26 C20.2
  L1 w20: v1(1762,3206) 1762,3205.02 1783.19,3183.83 1783.19,3159.57 D3.2 ; v1(2108,2690) 2108.98,2690 2115.23,2683.75 C21.1 ; D1.1 2297.2,2211.5 2347.5,2211.5 v1(2348,2211) ; D2.1 2297.2,2287.5 2347.5,2287.5 v1(2348,2288)
  L1 w25: v1(1208,2306) 1208.54,2306.54 Y1.2 ; SW1.3 1231.42,3557.58 v1(1232,3557) ; Y1.4 1275.46,2511.46 v1(1276,2512) ; v1(1328,2467) 1330,2469 C12.1@1372,2469 ; v1(1335,2401) 1345,2401 1349,2397 C11.1@1375,2397 ; v1(1339,3155) 1343,3159 C10.2 ; C22.2 v1(1389,3082) ; SW1.1 1408.58,3561.42 v1(1410,3560) ; D5.2 v1(1440,2764) ; v1(1516,3482) 1519,3485 R9.1 ; v1(1617,3401) 1655,3401 1673.05,3419.05 1673.05,3459.43 J1.B1A12 ; C14.1@1688.75,2145 1724,2145 v1(1725,2144) ; v1(1724,2198) 1724.68,2198.68 C5.2 ; v1(1796,2108) 1797,2109 C6.2 ; C7.1 1935.5,2115.5 v1(1937,2114) ; C8.2 v1(1887,2921) ; C3.2 1931.86,2605 v1@1946.5,2619.64 ; C2.2 1925,2359 v1(1926,2358) ; J1.A1B12 1926.4,3459.43 1926.4,3419.64 1941.04,3405 1978,3405 v1(1980,3403) ; v1(1945,3129) 1945.68,3129.68 C15.2 ; C1.1 v1(1994,2671) ; C9.1 v1(1963,2967) ; v1(2009,3127) C16.2 ; v1(2066,2914) 2075.5,2904.5 C18.1 ; v1(2081,3489) R8.1 ; v1(2124,3207) 2124.25,3206.75 C23.2 ; v1(2206,3549) 2206.42,3549.42 SW2.3 ; U3.2 2228.52,2935.69 2269.69,2935.69 v1(2278,2944) ; C19.2 2407,2829 v1(2408,2830) C17.1 ; v1(2370,3182) 2370.3,3181.7 D4.1 ; v1(2383,3551) 2383.58,3551.58 SW2.1
  other v1: 1574,2062 2085,2093 1224,2100 1356,2112 2229,2113 2394,2113 1489,2118 2037,2165 1584,2172 1369,2206 1209,2218 1457,2273 1583,2289 1325,2292 1547,2329 2054,2343 2328,2357 2159,2392 2283,2444 2397,2462 1215,2599 1324,2608 1947,2621 2022,2793 1659,2806 1484,2944 1868,3069 2249,3078 2006,3080 1220,3137 1519,3258 1643,3280 2061,3305 1487,3373 2128,3389
  other v2: 1676.57,2410.79 1725.79,2410.79 1775,2410.79 1676.57,2460 1725.79,2460 1775,2460 1676.57,2509.21 1725.79,2509.21 1775,2509.21
INT_ACC: U1.10 U4.16 | length 870
  L1 w10: U1.10 1856.8,2410.79 1878.59,2389 v1(1880,2389) ; v1(2281,2798) 2299.68,2779.32 U4.16
  L4 w10: v1(1880,2389) 1880,2609 2125,2854 2225,2854 v1(2281,2798)
INT_GYRO_GPIO9: C23.1 R11.1 SW2.2 SW2.4 U1.15 U4.12 | length 1419.4
  L1 w10: U1.15 1883.53,2509.21 1901.31,2527 v1(1939,2527) ; v1(2057,2848.69) 2087,2818.69 v1(2087,2740) ; v1(2155,3113) 2155.37,3113.37 2155.37,3158.63 C23.1 2156.75,3160 2204.7,3160 R11.1 2205.7,3252.43 SW2.4 SW2.2 ; v1(2200,2683) 2203.69,2683 2217.2,2669.49 U4.12
  L4 w10: v1(1939,2527) 1940,2528 2016,2528 2171,2683 ; v1(2057,2848.69) 2041,2864.69 2041,2999 v1(2155,3113) ; v1(2087,2740) 2114,2740 2171,2683 ; v1(2200,2683) 2171,2683
LED_A: R2.1 U1.8 | length 416.9
  L1 w8: U1.8 1794.68,2357.15 1795.61,2356.22 1816.78,2356.22 1924,2249 2063,2249 2100,2212 R2.1
LED_B: R3.1 U1.9 | length 365.9
  L1 w8: U1.9 1829.13,2391.1 1933.24,2287 R3.1
LNA_IN: C13.2 L2.2 U1.1 | length 130.8
  L1 w10: U1.1 1657.16,2365.24 1657.16,2288.76 C13.2 1657.54,2288.38 1657.54,2235.11 L2.2@1657.65,2235
MCU_USB_N: D3.3 U1.25 | length 849.8
  L1 w8: U1.25 1586.56,2528.9 1569,2546.46 1569,2967 1661,3059 1770.15,3059 1789,3077.85 1789,3104 1814.59,3129.59 1814.59,3149.94 D3.3
MCU_USB_P: D3.1 U1.26 | length 876.3
  L1 w8: U1.26 1580.79,2509.21 1551,2539 1551,2974.46 1653.54,3077 1762.69,3077 1771,3085.31 1771,3103.24 1747.42,3126.82 1747.42,3157.57 D3.1
Net_1: ?.1 U1.12 | length 476.1
  L1 w8: U1.12 1855.16,2450.16 1860,2455 2119,2455 2194,2530 2260.5,2530 ?.1
NetANT1_1: ANT1.1 C14.2 L2.1 | length 449.2
  L1 w15: ANT1.1@1656.63,1976.81 1656.63,2189.97 L2.1 ; ANT1.1@2026.25,1931.87 2026.25,1869.75 2027,1869 2028.06,1870.06 2069.56,1870.06 2110.52,1870.06 2112.87,1872.41 ANT1.1@2112.87,1957.46
NetC10_1: C10.1 R1.1 SW1.2 SW1.4 U1.7 | length 1412.4
  L1 w10: SW1.4 SW1.2 1409.75,3251.98 C10.1 1410.25,3158.5 1463.2,3158.5 R1.1 1463.35,3157.65 1463.35,3103.35 v1(1463,3103) ; U1.7 1775,2342.31 1800.31,2317 v1(1804,2317)
  L4 w10: v1(1463,3103) 1532,3034 1532,2519 1664.01,2386.99 1734.01,2386.99 v1(1804,2317)
NetC11_2: "Damping Resistor.1" C11.2 Y1.3 | length 159.7
  L1 w8: Y1.3@1270.1,2363.06 1374,2363.06 C11.2 ; C11.2@1376,2363.5 1382,2363.5 1429,2363.5
NetC12_2: C12.2 U1.29 Y1.1 | length 563.3
  L1 w8: Y1.1@1194.54,2458.31 1194.54,2522.54 1220,2548 1332,2548 1352,2528 1352,2501.94 C12.2@1371.37,2501.94 ; C12.2 1395.06,2500.94 1445.84,2450.16 U1.29
NetC19_1: C19.1 U3.4 | length 69
  L1 w8: U3.4 2333.25,2896.51 C19.1
NetD1_2: D1.2 R2.2 | length 86.4
  L1 w8: R2.2 D1.2
NetD2_2: D2.2 R3.2 | length 86.4
  L1 w8: R3.2 D2.2
NetD4_2: D4.2 R10.2 | length 61
  L1 w8: D4.2 2408.85,3128.85 2408.85,3071.05 R10.2
NetD5_4: D5.4 P1.2 | length 328.7
  L1 w10: P1.2@1225,2916 1430,2916 1479,2867 1479,2814.84 D5.4
NetD5_6: D5.6 P1.3 | length 158.7
  L1 w10: P1.3@1245,2816 1399.84,2816 D5.6
"NetDamping Resistor_2": "Damping Resistor.2" U1.30 | length 223.8
  L1 w8: 1433,2397.63 1433,2418 1445.47,2430.47 U1.30
NetJ1_A5: J1.A5 R8.2 | length 314.4
  L1 w8: J1.A5 1849,3460.18 1849,3527 1886.3,3564.3 R8.2
NetJ1_B5: J1.B5 R9.2 | length 292.3
  L1 w8: R9.2 1520.3,3554 1707,3554 1730.83,3530.17 J1.B5
NetR4_1: R4.1 U1.27 | length 259.2
  L1 w8: 1480,2523 1480,2503 1493.47,2489.53 U1.27 ; 1480,2524 R4.1
NetR5_1: R5.1 U1.28 | length 321.3
  L1 w8: R5.1 1403,2544 1477.16,2469.84 U1.28
NetU1_19: U1.19 U2.7 | length 301
  L1 w8: U1.19 1755.32,2702.32 1788.15,2735.15 1788.15,2839.16 U2.7
NetU1_20: U1.20 U2.3 | length 504.7
  L1 w8: v1(1716,2673) 1716,2672.93 1735.63,2653.3 U1.20 ; v1(1752,2984) 1770.37,2965.63 U2.3
  L4 w8: v1(1716,2673) 1716,2948 v1(1752,2984)
NetU1_21: U1.21 U2.1 | length 549.4
  L1 w8: v1(1710,2626) 1710,2621.77 1715.94,2615.83 U1.21 ; U2.1 1809.96,2939.71 1809.96,2957.96 1828.01,2976.01 1833.01,2976.01 v1(1836,2979)
  L4 w8: v1(1710,2626) 1737.5,2626 1837,2725.5 1837,2978 v1(1836,2979)
NetU1_22: U1.22 U2.6 | length 330.7
  L1 w8: U1.22 1696.26,2598.74 1680,2615 1680,2706 1770.37,2796.37 U2.6
NetU1_23: U1.23 U2.5 | length 322
  L1 w8: U1.23 1676.57,2585.43 1656,2606 1656,2718 1750,2812 1750,2829
NetU1_24: U1.24 U2.2 | length 685.6
  L1 w8: U1.24 1656.89,2577.11 1609,2625 1609,2949 1676,3016 1766,3016 1790.06,2991.94 U2.2
UART0_RX: D5.3 R4.2 | length 74.1
  L1 w10: D5.3 1478.7,2717.46 1478.7,2646.98 R4.2
UART0_TX: D5.1 R5.2 | length 73.2
  L1 w10: D5.1 1402.8,2718.56 1402.8,2645.89 R5.2
USB_N: D3.4 J1.A7 J1.B7 | length 314.9
  L1 w8: J1.A7 1791.7,3460.12 1791.7,3398 ; D3.4 1822.4,3328.6 1791.7,3359.3 1791.7,3398 ; J1.B7 1829.25,3410.25 1817,3398 1791.7,3398
USB_P: D3.6 J1.A6 J1.B6 | length 301.7
  L1 w8: D3.6 1747.6,3335.6 1770.2,3358.2 J1.B6 ; J1.B6@1770.2,3482.15 1770.2,3501.21 1778.98,3510 1800.18,3510 1809.57,3500.61 J1.A6@1809.57,3482.15
VBUS_FILT: C16.1 C18.2 C22.1 D5.5 L3.1 P1.1 U3.1 U3.3 | length 1515.9
  L1 w20: v1(1416,2877) 1416,2876.02 1438.19,2853.83 1438.19,2815.06 D5.5
  L1 w25: P1.1@1225,3014 1388.75,3014 C22.1 1445.27,3014.25 1447.02,3016 v1(1448,3016) ; L3.1 1996.65,3241.35 2009,3229 C16.1 2042.75,3203.75 2073,3173.5 2073,3048 2123,2998
  L3 w25: v1(1416,2877) 1416,2984 v1(1448,3016) ; v1@1449,3015 2161,3015 v1(2178,2998)
VBUS_USB: C15.1 D3.5 J1.A4B9 J1.B4A9 L3.2 | length 740.2
  L1 w20: v1@1705.24,3385.24 J1.B4A9 ; v1(1784,3309) 1784,3308.02 1785,3307.02 D3.5 1786.81,3250.43 1786.81,3225.85 1804.04,3208.62 1875.62,3208.62 1895,3228 ; J1.A4B9 1894.61,3459.72 1894.61,3386.39 v1(1895,3386) 1895,3228 ; L3.2@1953,3255.65 1953,3237 1945.92,3229.92 1945.92,3204.47 C15.1 1945.45,3204 1919,3204 1895,3228
  L3 w20: v1(1705,3384) 1705.69,3383.31 1709.69,3383.31 v1(1784,3309)
VCC_SPI: C8.1 C9.2 U1.18 U2.8 | length 455
  L1 w8: U1.18 1775,2687
  L1 w10: 1775,2687 1810,2722 1810,2777
  L1 w15: 1810,2777 1809.74,2777.26 U2.8 1809.83,2841.16 1886.91,2841.16 C8.1 1887.62,2841.88 1962.38,2841.88 C9.2
pads on no net: J1.A8 J1.B8 J1.MH J1.SH U1.4 U1.5 U4.1 U4.13

## Polygon pours and split planes (outlines as drawn)
GND on L1 "GND_L1" (solid, remove dead copper, pour order 19): 1535.05,2099.05 1606.05,2099.05 1606.05,2060 1633,2060 1633,2397 1681.05,2397 1681.05,2060 2433,2060 ccw(c2419.66,2099.63) 2458.05,2083.05 2458.05,3668.78 2459,3670 ccw(c2417,3670) 2417,3712 1197,3712 ccw(c1197,3672) 1157,3672 1157,2087 ccw(c1190.95,2087) 1189.47,2053.08 1189.47,2052.75 1534.75,2052.75 1535.05,2053.05 1535.05,2062.95
3V3 on L1 "NONET_L-01_P-001" (solid, pour order 3): 2306,2965 2315,2956 2438,2956 2442,2960 2442,3044 2435,3051 2313,3051 2306,3044
VBUS_FILT on L1 "NONET_L-01_P-001" (solid, pour order 1): 2251,2911 2256,2906 2256,2882 2252,2878 2181,2878 2159,2900 2159,2933 2145,2947 2107,2947 2096,2958 2096,3011 2110,3025 2230,3025 2257,2998 2257,2964 2249,2956 2201,2956 2195,2950 2195,2918 2199,2914 2248,2914
GND on L3 "GND_L3" (solid, remove dead copper, pour order 16): 2161,1990 cw(c2227,1987) 2230,2053 2425,2053 ccw(c2421,2089) 2457,2093 2457,3673 ccw(c2417,3673) 2417,3713 1196,3713 ccw(c1196,3674) 1157,3674 1157,2088 ccw(c1192,2088) 1192,2053 1449,2053 cw(c1449,1989) 1513,1989 1513,1893 ccw(c1548.5,1889.5) 1545,1854 2130,1854 ccw(c2125.5,1888.5) 2160,1893
3V3 on L3 "NONET_L-01_P-001" (solid, pour order 5): 2313,3052 2305,3044 2305,2965 2315,2955 2439,2955 2443,2959 2443,3044 2435,3052
GND on L4 "GND_L4" (solid, pour order 17): 2130,1854 ccw(c2126.5,1889.5) 2162,1893 2162,1990 cw(c2226.5,1988.5) 2228,2053 2425,2053 ccw(c2421,2089) 2457,2093 2457,3675 ccw(c2419,3675) 2419,3713 1195,3713 ccw(c1195,3675) 1157,3675 1157,2090 ccw(c1194,2090) 1194,2053 1449,2053 cw(c1449,1989) 1513,1989 1513,1893 ccw(c1549.5,1890.5) 1547,1854
GND on L2 (split plane): 2429.69,3704.62 2434.27,3703.52 2438.62,3701.72 2442.63,3699.26 2446.21,3696.21 2449.26,3692.63 2451.72,3688.62 2453.52,3684.27 2454.62,3679.69 2454.95,3675.5 2454.9,3675 2454.9,2147 2454.9,2084 2454.95,2083.5 2454.62,2079.31 2453.52,2074.73 2451.72,2070.38 2449.26,2066.37 2446.21,2062.79 2442.63,2059.74 2438.62,2057.28 2434.27,2055.48 2429.69,2054.38 2425.5,2054.05 2425,2054.1 2230,2054.1 2229.75,2054.07 2223.13,2053.75 2216.33,2052.74 2209.66,2051.07 2203.18,2048.75 2196.96,2045.81 2191.06,2042.27 2185.54,2038.18 2180.44,2033.56 2175.82,2028.46 2171.73,2022.94 2168.19,2017.04 2165.25,2010.82 2162.93,2004.34 2161.26,1997.67 2160.25,1990.87 2159.93,1984.25 2159.9,1984 2159.9,1885 2159.95,1884.5 2159.62,1880.31 2158.52,1875.73 2156.72,1871.38 2154.26,1867.37 2151.21,1863.79 2147.63,1860.74 2143.62,1858.28 2139.27,1856.48 2134.69,1855.38 2130.5,1855.05 2130,1855.1 1545,1855.1 1544.5,1855.05 1540.31,1855.38 1535.73,1856.48 1531.38,1858.28 1527.37,1860.74 1523.79,1863.79 1520.74,1867.37 1518.28,1871.38 1516.48,1875.73 1515.38,1880.31 1515.05,1884.5 1515.1,1885 1515.1,1984 1515.07,1984.25 1514.75,1990.87 1513.74,1997.67 1512.07,2004.34 1509.75,2010.82 1506.81,2017.04 1503.27,2022.94 1499.18,2028.46 1494.56,2033.56 1489.46,2038.18 1483.94,2042.27 1478.04,2045.81 1471.82,2048.75 1465.34,2051.07 1458.67,2052.74 1451.87,2053.75 1445.25,2054.07 1445,2054.1 1195,2054.1 1194.5,2054.05 1190.31,2054.38 1185.73,2055.48 1181.38,2057.28 1177.37,2059.74 1173.79,2062.79 1170.74,2066.37 1168.28,2070.38 1166.48,2074.73 1165.38,2079.31 1165.05,2083.5 1165.1,2084 1165.1,3675 1165.05,3675.5 1165.38,3679.69 1166.48,3684.27 1168.28,3688.62 1170.74,3692.63 1173.79,3696.21 1177.37,3699.26 1181.38,3701.72 1185.73,3703.52 1190.31,3704.62 1194.5,3704.95 1195,3704.9 2425,3704.9 2425.5,3704.95

## Silkscreen, mask and mechanical layers (free items; w line width, h text height)
Top Overlay:
  text "+" at 1308,2993.45 h60
  text "RX" at 1293,2901 h60
  text "TX" at 1292,2794 h60
  text "_" at 1307,2726.6 h60
  text "UART" at 1171.5,2607.5 h40
  text "B" at 2264,2327 h60
  text "A" at 2262,2134 h60